# Altium PCB SAU-G0-EX_Splicing.PcbDoc
Units mil, origin at the board's own origin, x right, y up, seen from the top; angles counter-clockwise.
Board outline 2681.5 x 767.84 mil, 2 copper layers (Top Layer, Bottom Layer), stack 35.802 mil thick; 2 components, 8 nets, 8 pads, 0 vias.
Unrouted connection lines stored in the file: 3.
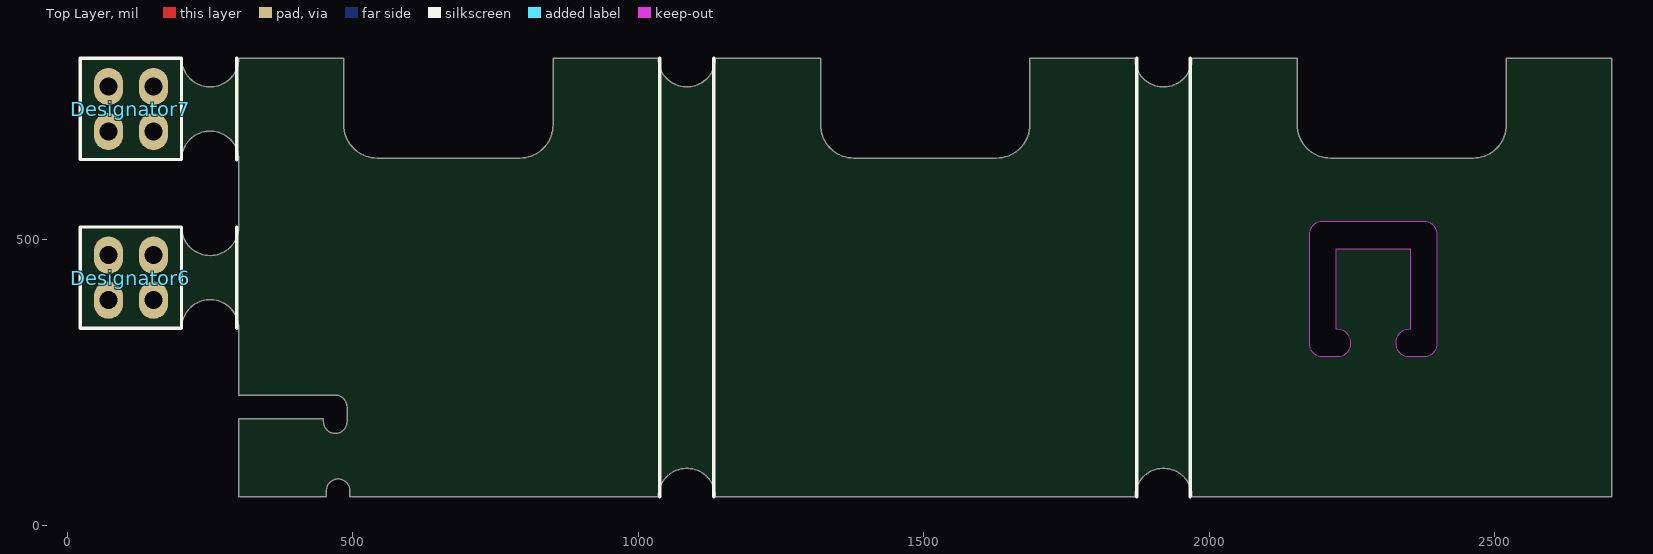
[diagram p0: Top Layer view]
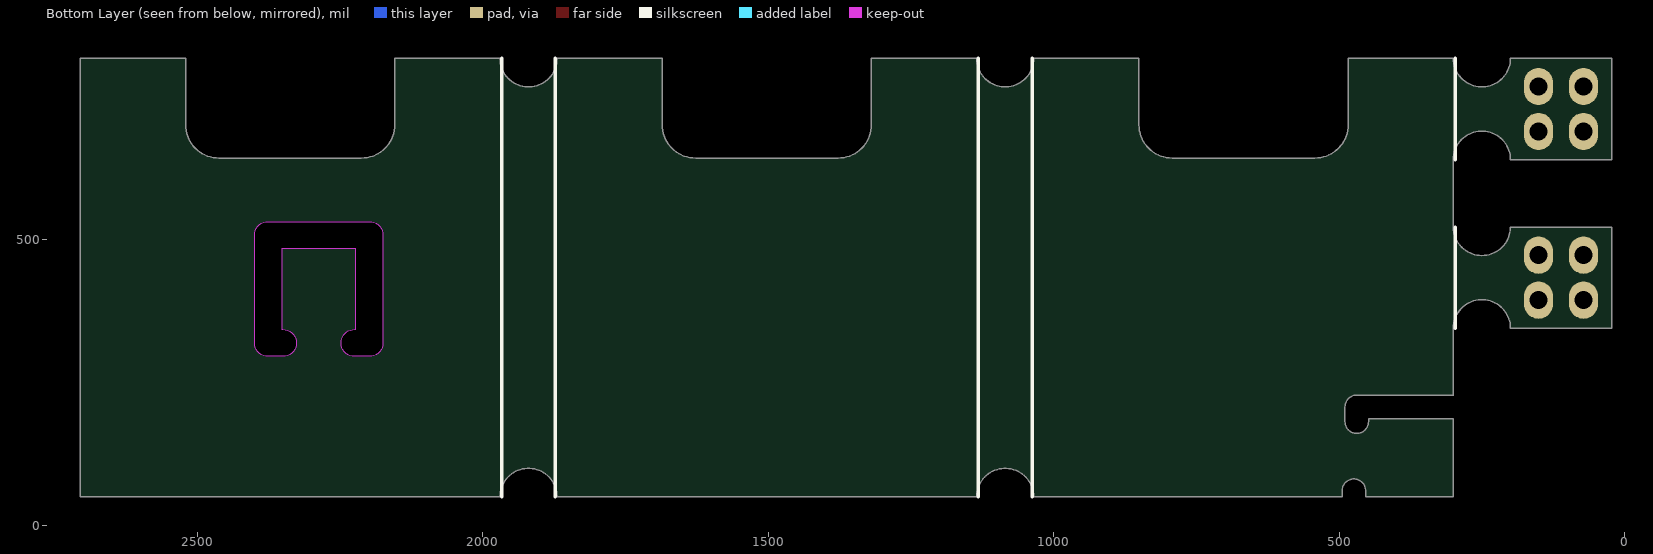
[diagram p1: Bottom Layer view, seen from below]

## Layer stack, top to bottom
Top Solder: solder mask 0.4, Solder Resist, Dk 3.5
Top Layer: signal copper 1.4
Dielectric 2: prepreg 2.8, PP-006, Dk 4.1
Dielectric 1: dielectric 27.4016, FR-4, Dk 4.8
Dielectric 3: prepreg 2.8, PP-006, Dk 4.1
Bottom Layer: signal copper 1.4
Bottom Solder: solder mask 0.4, Solder Resist, Dk 3.5

## Board outline
22.85,345.33 200,345.33 cw(c250,345.33) 300,345.33 300,228.24 469.15,228.24 cw(c469.12,207.59) 489.78,207.62 489.78,181.76 cw(c469.16,181.76) 448.54,181.76 448.54,187 300,187 300,50 453.54,50 453.54,60.77 cw(c474.16,60.77) 494.78,60.77 494.78,50 1034.77,50 cw(c1084.77,50) 1134.77,50 1869.54,50 cw(c1919.54,50) 1969.54,50 2704.32,50 2704.32,817.84 2520.15,817.84 2520.15,701.64 cw(c2461.72,701.65) 2461.73,643.22 2212.13,643.22 cw(c2212.14,701.65) 2153.71,701.64 2153.71,817.84 1969.54,817.84 cw(c1919.54,817.84) 1869.54,817.84 1685.38,817.84 1685.38,701.64 cw(c1626.95,701.65) 1626.96,643.22 1377.36,643.22 cw(c1377.37,701.65) 1318.94,701.64 1318.94,817.84 1134.77,817.84 cw(c1084.77,817.84) 1034.77,817.84 850.61,817.84 850.61,701.64 cw(c792.18,701.65) 792.19,643.22 542.58,643.22 cw(c542.59,701.65) 484.17,701.64 484.17,817.84 300,817.84 cw(c250,817.84) 200,817.84 22.84,817.84 22.83,817.82 22.84,817.82 22.84,640.68 22.85,640.67 199.99,640.67 200,640.68 cw(c250,640.68) 300,640.68 300,522.51 cw(c250,522.51) 200,522.49 22.83,522.49 22.82,522.48 22.83,522.48 22.83,345.34
cut-out: 2174.67,319.61 ccw(c2198.34,319.65) 2198.3,295.97 ccw(c2198.31,298.99) 2198.31,295.97 2224.17,295.97 ccw(c2224.17,298.99) 2224.2,295.97 ccw(c2224.17,319.61) 2247.81,319.61 ccw(c2224.17,319.61) 2224.17,343.25 2221.94,343.25 2221.94,484.75 2351.91,484.75 2351.91,343.25 2349.69,343.25 ccw(c2349.69,319.61) 2349.66,295.97 ccw(c2349.69,319.61) 2349.69,295.97 2375.55,295.97 ccw(c2375.55,298.99) 2375.56,295.97 ccw(c2375.52,319.65) 2399.19,319.61 ccw(c2396.17,319.61) 2399.19,319.61 2399.19,508.35 ccw(c2396.17,508.35) 2399.19,508.36 ccw(c2375.52,508.31) 2375.55,531.99 ccw(c2375.55,528.97) 2375.55,531.99 2198.31,531.99 ccw(c2198.31,528.97) 2198.31,531.99 ccw(c2198.34,508.31) 2174.67,508.36 ccw(c2177.69,508.35) 2174.67,508.35

## Design rules (kind name [scope] priority, off if disabled: settings)
BoardOutlineClearance [All] p1: gap=10 ignorepadtopadclearanceinfootprint=FALSE except(0: Arc-SplitContinuation Track-SplitContinuation SMDPad-SplitContinuation THPad-SplitContinuation Via-SplitContinuation Fill-SplitContinuation Poly-SplitContinuation Region-SplitContinuation Text-SplitContinuation)
Clearance [All] p1: gap=5 ignorepadtopadclearanceinfootprint=FALSE except(0: Arc-Text Arc-Hole Track-Text Track-Hole SMDPad-Text SMDPad-Hole THPad-Text THPad-Hole Via-Text Via-Hole Fill-Text Fill-Hole Poly-Text Poly-Hole Region-Text Region-Hole Text-Text Text-Hole)
MinimumSolderMaskSliver [All] p1: minsoldermaskwidth=0
PlaneClearance [All] p1: clearance=10
PlaneConnect [All] p1: planeconnectstyle=Direct reliefexpansion=10 reliefentries=4 reliefconductorwidth=10 reliefairgap=10
PolygonConnect [All] p1: connectstyle=Direct reliefconductorwidth=10 reliefentries=4 polygonreliefangle="90 Angle" airgapwidth=10
RoutingVias [All] p1: holewidth=11.81 width=19.68 viastyle="Through Hole" minholewidth=11.81 minwidth=19.68 maxholewidth=196.85 maxwidth=196.85
SilkToSilkClearance [All] p1: silktosilkclearance=0
SilkToSolderMaskClearance [IsPad] p1: minsilkscreentomaskgap=0 clearancetoexposedcopper=TRUE
SolderMaskExpansion [All] p1: expansion=2
Width [All] p1: maxlimit=100 minlimit=5 preferedwidth=5
25 further rules are at their usual default settings.

## Components (designator, comment, footprint, x,y, rotation, side; value= is the part's Value field where it differs from the comment)
Designator6 "Comment" 2.0mm_Fmale_2x2 111.41,433.92 r0 top
Designator7 "Comment" 2.0mm_Fmale_2x2 111.41,729.25 r0 top

## Footprints (in the part's own frame and the unit in brackets; to place one, negate y for a bottom-side part, rotate by r counter-clockwise, add the part's x,y. Pads: shape width x height; smd on the part's side, far side on the other; paste and mask are expansions set on the pad)
2.0mm_Fmale_2x2 [mm]
  oval 1.3x1.66 hole 0.8: 1(-1,1) 2(1,1) 3(-1,-1) 4(1,-1)
  silkscreen extent -2.25,-2.25 2.25,2.25, body extent -2.25,-2.25 2.25,2.25, height 4.3

## Nets (pads, with @x,y where several pads share a name; then routed paths per layer and width w, separated by ;. In a path a pad name is that pad's centre, name@x,y a point inside that pad or via, vN(x,y) a via of type N, cw(c..) or ccw(c..) an arc to the next point about the centre after c; other vN are vias at no path point)
3V3: 
GND: 
GPIO_ndef: 
PB6/MISO2: 
SCL1/SCK2: 
SDA1/MOSI2: 
SPI2_NSS: 
VbatWeek: 
pads on no net: Designator6.1 Designator6.2 Designator6.3 Designator6.4 Designator7.1 Designator7.2 Designator7.3 Designator7.4

## Silkscreen, mask and mechanical layers (free items; w line width, h text height)
Top Overlay:
  lines w6: 297,345.34 297,522.5 ; 297,640.68 297,817.84 ; 1037.77,50 1037.77,817.84 ; 1131.77,50 1131.77,817.84 ; 1872.54,50 1872.54,817.84 ; 1966.54,50 1966.54,817.84
Bottom Overlay:
  lines w6: 297,345.34 297,522.5 ; 297,640.68 297,817.84 ; 1037.77,50 1037.77,817.84 ; 1131.77,50 1131.77,817.84 ; 1872.54,50 1872.54,817.84 ; 1966.54,50 1966.54,817.84
Mechanica 16:
  lines w5.98: 200,345.33 cw(c250,345.33) 300,345.33 ; 200,522.49 ccw(c250,522.51) 300,522.51 ; 200,640.68 cw(c250,640.68) 300,640.68 ; 200,817.84 ccw(c250,817.84) 300,817.84 ; 1034.77,50 cw(c1084.77,50) 1134.77,50 ; 1034.77,817.84 ccw(c1084.77,817.84) 1134.77,817.84 ; 1869.54,50 cw(c1919.54,50) 1969.54,50 ; 1869.54,817.84 ccw(c1919.54,817.84) 1969.54,817.84
  lines w6: 200,345.33 22.85,345.33 ; 200,522.49 22.83,522.49 ; 199.99,640.67 22.85,640.67 22.84,640.68 22.84,817.82 ; 200,817.84 22.84,817.84 22.83,817.82 ; 300,345.33 300,228.24 469.15,228.24 cw(c469.12,207.59) 489.78,207.62 489.78,181.76 cw(c469.16,181.76) 448.54,181.76 448.54,187 300,187 300,50 453.54,50 453.54,60.77 cw(c474.16,60.77) 494.78,60.77 494.78,50 1034.77,50 ; 300,522.51 300,640.68 ; 300,817.84 484.17,817.84 484.17,701.64 ccw(c542.59,701.65) 542.58,643.22 792.19,643.22 ccw(c792.18,701.65) 850.61,701.64 850.61,817.84 1034.77,817.84 ; 1134.77,50 1869.54,50 ; 1134.77,817.84 1318.94,817.84 1318.94,701.64 ccw(c1377.37,701.65) 1377.36,643.22 1626.96,643.22 ccw(c1626.95,701.65) 1685.38,701.64 1685.38,817.84 1869.54,817.84 ; 1969.54,50 2704.32,50 2704.32,817.84 2520.15,817.84 2520.15,701.64 cw(c2461.72,701.65) 2461.73,643.22 2212.13,643.22 cw(c2212.14,701.65) 2153.71,701.64 2153.71,817.84 1969.54,817.84 ; 22.83,345.34 22.83,522.48 ; 22.83,345.34 22.85,345.33 ; 22.83,522.49 22.82,522.48 22.83,522.48 ; 22.83,817.82 22.84,817.82 ; 2218.93,340.23 2218.93,487.77 ; 2218.93,340.23 2218.93,487.77 ; 2218.93,340.23 2224.17,340.23 cw(c2224.17,319.61) 2224.17,298.99 2198.31,298.99 cw(c2198.34,319.65) 2177.69,319.61 2177.69,508.35 cw(c2198.34,508.31) 2198.31,528.97 2375.55,528.97 cw(c2375.52,508.31) 2396.17,508.35 2396.17,319.61 cw(c2375.52,319.65) 2375.55,298.99 2349.69,298.99 cw(c2349.69,319.61) 2349.69,340.23 2354.93,340.23 2354.93,487.77 2218.93,487.77

## Panel: embedded boards
"..\SAU-G0-EX_microSD\SAU-G0-EX_microSD.PcbDoc" at 1134.77,50, 1 rows x 1 columns, spacing 2500 x 1500, rotation 0
"..\SAU-G0-EX_AHT-PL\SAU-G0-EX_AHT-PL.PcbDoc" at 300,50, 1 rows x 1 columns, spacing 2500 x 1500, rotation 0
"..\SAU-G0-EX_AHT-GL\SAU-G0-EX_AHT-GL.PcbDoc" at 1969.54,50, 1 rows x 1 columns, spacing 2500 x 1500, rotation 0